# EAGLE board PCBprototyp-Rev3-m (EAGLE 9.6.2)
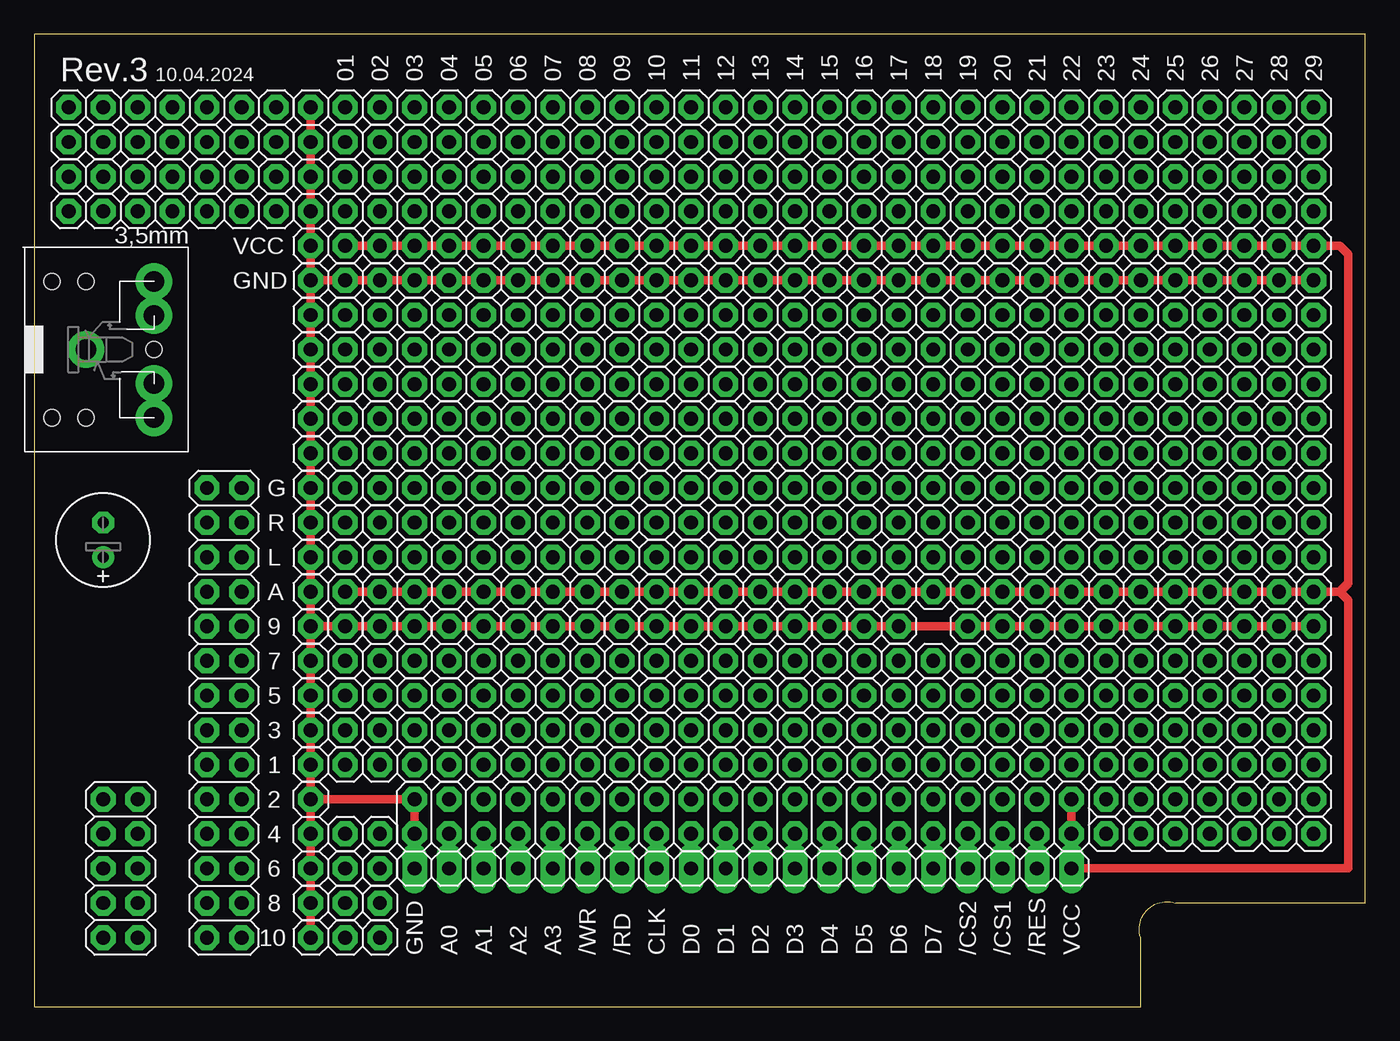
[diagram p0: board, top side]
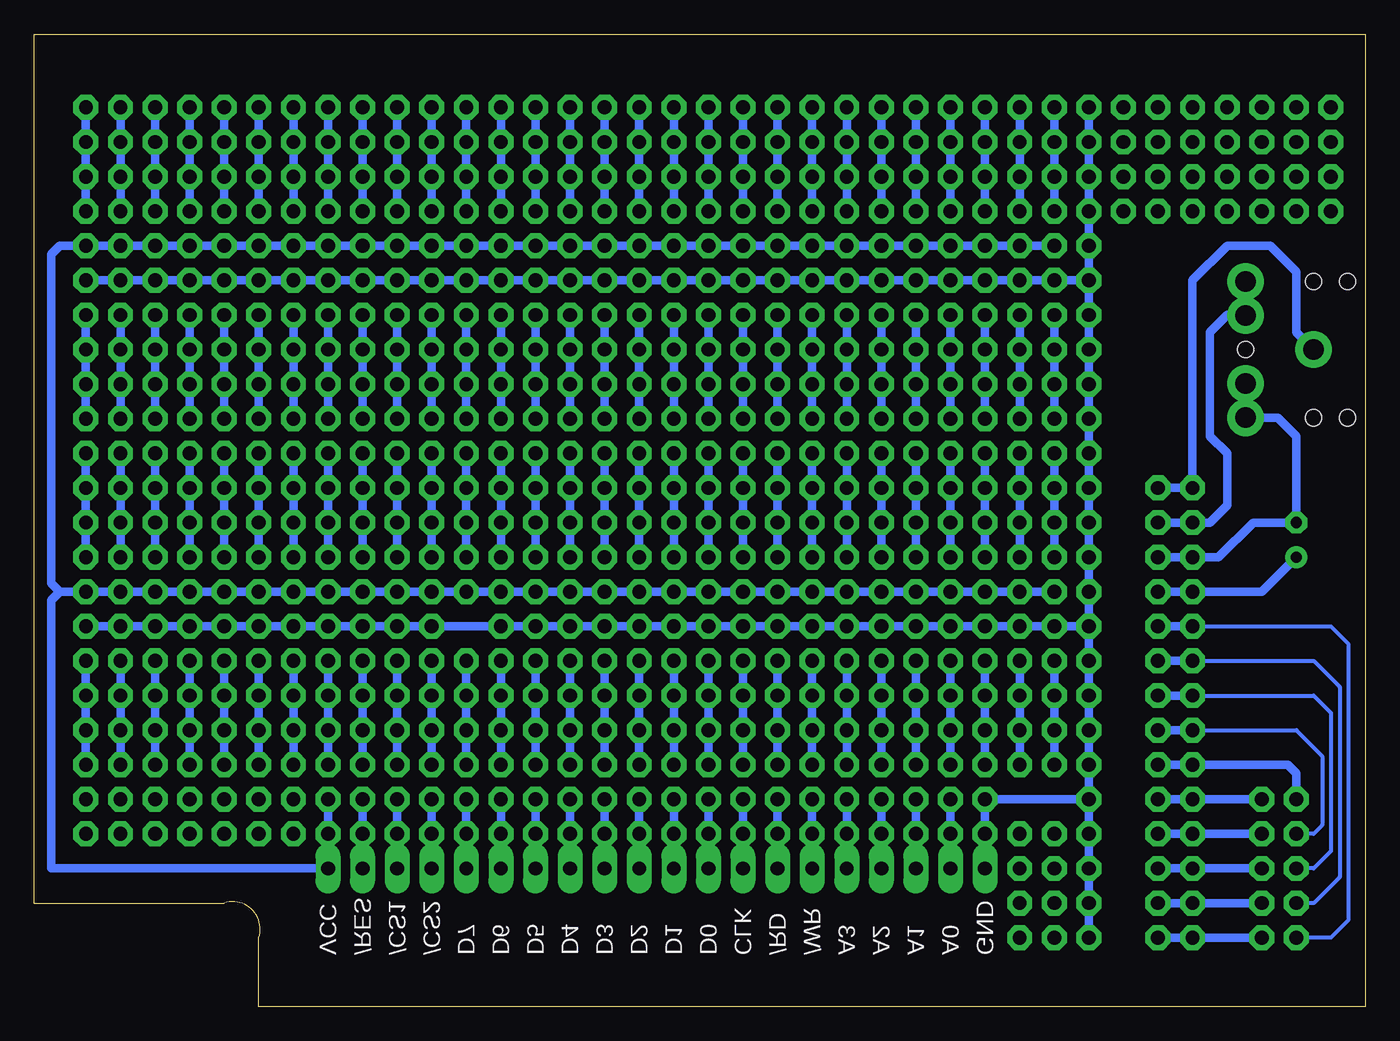
[diagram p1: board, bottom side, seen from below]

Size 97.79 x 71.42 mm. Coordinates in mm from the lower left corner, seen from the top.
Outline: 97.77,7.62 97.77,71.42 0,71.42 0,0 81.28,0 81.28,5.08 arc-127 83.82,7.62 97.79,7.62
Copper layers (1*16): Top 0.035mm / dielectric 1.6mm / Bottom 0.035mm
Design rules "jlcpcb-2layers": minimum track width 5mil, minimum drill 0.3mm, track to track 5mil, track to pad 5mil, pad to pad 5mil, via to via 5mil, smd to smd 5mil, copper to edge 0.2mm, drill to drill 6mil, minimum pad ring 10mil, minimum via ring 3mil, stop-mask expansion 4mil, vias tented up to drill 0mil, thermal gap 10mil
Net classes: 0 default: width 0.254 mm; 1 Power: width 0.457 mm

## Footprints (pad centres in the part's own frame; a part is rotated, then mirrored left to right if it is on the bottom)
E2,5-7 = drill 0.813 pad 1.6: + -1.27,0 | drill 0.813 pad 1.6 octagon: - 1.27,0
1X20 = drill 1.016 long: 1 -24.13,0; 2 -21.59,0; 3 -19.05,0; 4 -16.51,0; 5 -13.97,0; 6 -11.43,0; 7 -8.89,0; 8 -6.35,0; 9 -3.81,0; 10 -1.27,0; 11 1.27,0; 12 3.81,0; 13 6.35,0; 14 8.89,0; 15 11.43,0; 16 13.97,0; 17 16.51,0; 18 19.05,0; 19 21.59,0; 20 24.13,0
1X01 = drill 1.016 octagon: 1 0,0
2X20 = drill 1.016 octagon: 1 -24.13,-1.27; 2 -24.13,1.27; 3 -21.59,-1.27; 4 -21.59,1.27; 5 -19.05,-1.27; 6 -19.05,1.27; 7 -16.51,-1.27; 8 -16.51,1.27; 9 -13.97,-1.27; 10 -13.97,1.27; 11 -11.43,-1.27; 12 -11.43,1.27; 13 -8.89,-1.27; 14 -8.89,1.27; 15 -6.35,-1.27; 16 -6.35,1.27; 17 -3.81,-1.27; 18 -3.81,1.27; 19 -1.27,-1.27; 20 -1.27,1.27; 21 1.27,-1.27; 22 1.27,1.27; 23 3.81,-1.27; 24 3.81,1.27; 25 6.35,-1.27; 26 6.35,1.27; 27 8.89,-1.27; 28 8.89,1.27; 29 11.43,-1.27; 30 11.43,1.27; 31 13.97,-1.27; 32 13.97,1.27; 33 16.51,-1.27; 34 16.51,1.27; 35 19.05,-1.27; 36 19.05,1.27; 37 21.59,-1.27; 38 21.59,1.27; 39 24.13,-1.27; 40 24.13,1.27
2X10 = drill 1.016 octagon: 1 -11.43,-1.27; 2 -11.43,1.27; 3 -8.89,-1.27; 4 -8.89,1.27; 5 -6.35,-1.27; 6 -6.35,1.27; 7 -3.81,-1.27; 8 -3.81,1.27; 9 -1.27,-1.27; 10 -1.27,1.27; 11 1.27,-1.27; 12 1.27,1.27; 13 3.81,-1.27; 14 3.81,1.27; 15 6.35,-1.27; 16 6.35,1.27; 17 8.89,-1.27; 18 8.89,1.27; 19 11.43,-1.27; 20 11.43,1.27
2X05 = drill 1.016 octagon: 1 -5.08,-1.27; 2 -5.08,1.27; 3 -2.54,-1.27; 4 -2.54,1.27; 5 0,-1.27; 6 0,1.27; 7 2.54,-1.27; 8 2.54,1.27; 9 5.08,-1.27; 10 5.08,1.27
2X04 = drill 1.016 octagon: 1 -3.81,-1.27; 2 -3.81,1.27; 3 -1.27,-1.27; 4 -1.27,1.27; 5 1.27,-1.27; 6 1.27,1.27; 7 3.81,-1.27; 8 3.81,1.27
SJ1-352XN = drill 1.5 pad 2.184: 1 0,0; 2 5,-5; 3 5,5; 10 5,-2.5; 11 5,2.5 | hole 1.2: 5,0; 0,5; 0,-5; -2.5,-5; -2.5,5

## Placement (x,y rotation side)
C7  220µF  [E2,5-7]  5.08,34.29 90 top
JP1  [1X20]  52.07,10.16 180 top
JP2  [1X01]  93.98,27.94 0 top
JP3  [2X20]  52.07,13.97 180 top
JP4  [2X10]  13.97,16.51 90 top
JP5  [1X01]  22.86,25.4 0 top
JP6  [1X01]  22.86,22.86 0 top
JP7  [1X01]  22.86,20.32 0 top
JP8  [1X01]  22.86,17.78 0 top
JP9  [1X01]  33.02,27.94 90 top
JP10  [1X01]  22.86,27.94 90 top
JP11  [1X01]  27.94,27.94 90 top
JP12  [1X01]  25.4,27.94 90 top
JP13  [1X01]  30.48,27.94 90 top
JP14  [1X01]  35.56,27.94 90 top
JP15  [1X01]  38.1,27.94 90 top
JP16  [1X01]  40.64,27.94 90 top
JP17  [1X01]  43.18,27.94 90 top
JP18  [1X01]  45.72,27.94 90 top
JP19  [1X01]  48.26,27.94 90 top
JP20  [1X01]  50.8,27.94 90 top
JP21  [1X01]  53.34,27.94 90 top
JP22  [1X01]  55.88,27.94 90 top
JP23  [1X01]  58.42,27.94 90 top
JP24  [1X01]  60.96,27.94 90 top
JP26  [1X01]  63.5,27.94 0 top
JP27  [1X01]  71.12,27.94 0 top
JP28  [1X01]  68.58,27.94 0 top
JP29  [1X01]  73.66,27.94 0 top
JP30  [1X01]  76.2,27.94 0 top
JP31  [1X01]  78.74,27.94 0 top
JP32  [1X01]  81.28,27.94 0 top
JP33  [1X01]  83.82,27.94 0 top
JP34  [1X01]  43.18,30.48 0 top
JP35  [1X01]  53.34,30.48 0 top
JP36  [1X01]  63.5,30.48 0 top
JP37  [1X01]  66.04,30.48 0 top
JP38  [1X01]  83.82,30.48 0 top
JP39  [1X01]  40.64,30.48 0 top
JP40  [1X01]  50.8,30.48 0 top
JP41  [1X01]  60.96,30.48 0 top
JP42  [1X01]  68.58,30.48 0 top
JP43  [1X01]  81.28,30.48 0 top
JP44  [1X01]  38.1,30.48 0 top
JP45  [1X01]  48.26,30.48 0 top
JP46  [1X01]  58.42,30.48 0 top
JP47  [1X01]  71.12,30.48 0 top
JP48  [1X01]  78.74,30.48 0 top
JP49  [1X01]  35.56,30.48 0 top
JP50  [1X01]  45.72,30.48 0 top
JP51  [1X01]  55.88,30.48 0 top
JP52  [1X01]  73.66,30.48 0 top
JP53  [1X01]  76.2,30.48 0 top
JP54  [1X01]  22.86,30.48 0 top
JP55  [1X01]  25.4,30.48 0 top
JP56  [1X01]  27.94,30.48 0 top
JP57  [1X01]  30.48,30.48 0 top
JP58  [1X01]  33.02,30.48 0 top
JP59  [1X01]  22.86,33.02 0 top
JP60  [1X01]  22.86,35.56 0 top
JP61  [1X01]  22.86,38.1 0 top
JP62  [1X01]  22.86,40.64 0 top
JP63  [1X01]  22.86,63.5 0 top
JP64  [1X01]  22.86,60.96 0 top
JP65  [1X01]  22.86,58.42 0 top
JP66  [1X01]  22.86,66.04 0 top
JP67  [1X01]  22.86,45.72 0 top
JP68  [1X01]  22.86,43.18 0 top
JP69  [1X01]  20.32,15.24 90 top
JP70  [1X01]  20.32,12.7 90 top
JP71  [1X01]  20.32,58.42 90 top
JP72  [1X01]  20.32,7.62 0 top
JP73  [1X01]  20.32,5.08 0 top
JP74  [1X01]  20.32,66.04 90 top
JP75  [1X01]  20.32,63.5 90 top
JP76  [1X01]  20.32,60.96 90 top
JP77  [1X01]  20.32,10.16 0 top
JP78  [1X01]  20.32,55.88 0 top
JP79  [1X01]  20.32,43.18 0 top
JP80  [1X01]  20.32,45.72 0 top
JP81  [1X01]  20.32,48.26 0 top
JP82  [1X01]  20.32,50.8 0 top
JP83  [1X01]  20.32,53.34 0 top
JP84  [1X01]  20.32,30.48 0 top
JP85  [1X01]  20.32,33.02 0 top
JP86  [1X01]  20.32,35.56 0 top
JP87  [1X01]  20.32,38.1 0 top
JP88  [1X01]  20.32,40.64 0 top
JP89  [1X01]  20.32,27.94 0 top
JP90  [1X01]  20.32,25.4 0 top
JP91  [1X01]  20.32,22.86 0 top
JP92  [1X01]  20.32,20.32 0 top
JP93  [1X01]  20.32,17.78 0 top
JP94  [2X05]  6.35,10.16 270 top
JP95  [2X04]  13.97,34.29 90 top
JP96  [1X01]  88.9,27.94 0 top
JP97  [1X01]  86.36,27.94 0 top
JP98  [1X01]  91.44,27.94 0 top
JP99  [1X01]  88.9,30.48 0 top
JP100  [1X01]  93.98,30.48 0 top
JP101  [1X01]  86.36,30.48 0 top
JP102  [1X01]  91.44,30.48 0 top
JP103  [1X01]  25.4,33.02 0 top
JP104  [1X01]  25.4,35.56 0 top
JP105  [1X01]  25.4,38.1 0 top
JP106  [1X01]  25.4,40.64 0 top
JP107  [1X01]  25.4,43.18 0 top
JP108  [1X01]  25.4,45.72 0 top
JP109  [1X01]  25.4,48.26 0 top
JP110  [1X01]  25.4,50.8 0 top
JP111  [1X01]  53.34,55.88 0 top
JP112  [1X01]  60.96,55.88 0 top
JP113  [1X01]  55.88,55.88 0 top
JP114  [1X01]  50.8,55.88 0 top
JP115  [1X01]  45.72,55.88 0 top
JP116  [1X01]  43.18,55.88 0 top
JP117  [1X01]  40.64,55.88 0 top
JP118  [1X01]  38.1,55.88 0 top
JP119  [1X01]  35.56,55.88 0 top
JP120  [1X01]  91.44,55.88 0 top
JP121  [1X01]  93.98,55.88 0 top
JP122  [1X01]  22.86,55.88 0 top
JP123  [1X01]  25.4,55.88 0 top
JP124  [1X01]  88.9,55.88 0 top
JP125  [1X01]  86.36,55.88 0 top
JP126  [1X01]  83.82,55.88 0 top
JP127  [1X01]  27.94,55.88 0 top
JP128  [1X01]  76.2,55.88 0 top
JP129  [1X01]  78.74,55.88 0 top
JP130  [1X01]  81.28,55.88 0 top
JP131  [1X01]  30.48,55.88 0 top
JP132  [1X01]  73.66,55.88 0 top
JP133  [1X01]  71.12,55.88 0 top
JP134  [1X01]  68.58,55.88 0 top
JP135  [1X01]  33.02,55.88 0 top
JP136  [1X01]  63.5,55.88 0 top
JP137  [1X01]  66.04,55.88 0 top
JP138  [1X01]  58.42,55.88 0 top
JP139  [1X01]  48.26,55.88 0 top
JP140  [1X01]  83.82,53.34 0 top
JP141  [1X01]  81.28,53.34 0 top
JP142  [1X01]  91.44,53.34 0 top
JP143  [1X01]  93.98,53.34 0 top
JP144  [1X01]  76.2,53.34 0 top
JP145  [1X01]  78.74,53.34 0 top
JP146  [1X01]  88.9,53.34 0 top
JP147  [1X01]  86.36,53.34 0 top
JP148  [1X01]  68.58,53.34 0 top
JP149  [1X01]  71.12,53.34 0 top
JP150  [1X01]  73.66,53.34 0 top
JP151  [1X01]  43.18,53.34 0 top
JP152  [1X01]  66.04,53.34 0 top
JP153  [1X01]  63.5,53.34 0 top
JP154  [1X01]  60.96,53.34 0 top
JP155  [1X01]  40.64,53.34 0 top
JP156  [1X01]  53.34,53.34 0 top
JP157  [1X01]  55.88,53.34 0 top
JP158  [1X01]  58.42,53.34 0 top
JP159  [1X01]  38.1,53.34 0 top
JP160  [1X01]  50.8,53.34 0 top
JP161  [1X01]  48.26,53.34 0 top
JP162  [1X01]  45.72,53.34 0 top
JP163  [1X01]  35.56,53.34 0 top
JP164  [1X01]  25.4,53.34 0 top
JP165  [1X01]  27.94,53.34 0 top
JP166  [1X01]  30.48,53.34 0 top
JP167  [1X01]  33.02,53.34 0 top
JP168  [1X01]  22.86,53.34 0 top
JP169  [1X01]  22.86,50.8 0 top
JP170  [1X01]  22.86,48.26 0 top
JP171  [1X01]  78.74,12.7 0 top
JP172  [1X01]  22.86,12.7 0 top
JP173  [1X01]  17.78,66.04 0 top
JP174  [1X01]  17.78,63.5 0 top
JP175  [1X01]  78.74,15.24 0 top
JP176  [1X01]  17.78,60.96 0 top
JP177  [1X01]  17.78,58.42 0 top
JP178  [1X01]  27.94,33.02 0 top
JP179  [1X01]  27.94,35.56 0 top
JP180  [1X01]  27.94,38.1 0 top
JP181  [1X01]  27.94,40.64 0 top
JP182  [1X01]  30.48,33.02 0 top
JP183  [1X01]  30.48,35.56 0 top
JP184  [1X01]  30.48,38.1 0 top
JP185  [1X01]  30.48,40.64 0 top
JP186  [1X01]  30.48,43.18 0 top
JP187  [1X01]  30.48,45.72 0 top
JP188  [1X01]  30.48,48.26 0 top
JP189  [1X01]  30.48,50.8 0 top
JP190  [1X01]  27.94,45.72 0 top
JP191  [1X01]  27.94,43.18 0 top
JP192  [1X01]  27.94,50.8 0 top
JP193  [1X01]  27.94,48.26 0 top
JP194  [1X01]  33.02,33.02 0 top
JP195  [1X01]  33.02,35.56 0 top
JP196  [1X01]  33.02,38.1 0 top
JP197  [1X01]  33.02,40.64 0 top
JP198  [1X01]  35.56,33.02 0 top
JP199  [1X01]  35.56,35.56 0 top
JP200  [1X01]  35.56,38.1 0 top
JP201  [1X01]  35.56,40.64 0 top
JP202  [1X01]  35.56,43.18 0 top
JP203  [1X01]  35.56,45.72 0 top
JP204  [1X01]  35.56,48.26 0 top
JP205  [1X01]  35.56,50.8 0 top
JP206  [1X01]  33.02,45.72 0 top
JP207  [1X01]  33.02,43.18 0 top
JP208  [1X01]  33.02,50.8 0 top
JP209  [1X01]  33.02,48.26 0 top
JP210  [1X01]  38.1,33.02 0 top
JP211  [1X01]  38.1,35.56 0 top
JP212  [1X01]  38.1,38.1 0 top
JP213  [1X01]  38.1,40.64 0 top
JP214  [1X01]  40.64,33.02 0 top
JP215  [1X01]  40.64,35.56 0 top
JP216  [1X01]  40.64,38.1 0 top
JP217  [1X01]  40.64,40.64 0 top
JP218  [1X01]  40.64,43.18 0 top
JP219  [1X01]  40.64,45.72 0 top
JP220  [1X01]  40.64,48.26 0 top
JP221  [1X01]  40.64,50.8 0 top
JP222  [1X01]  38.1,45.72 0 top
JP223  [1X01]  38.1,43.18 0 top
JP224  [1X01]  38.1,50.8 0 top
JP225  [1X01]  38.1,48.26 0 top
JP226  [1X01]  43.18,33.02 0 top
JP227  [1X01]  43.18,35.56 0 top
JP228  [1X01]  43.18,38.1 0 top
JP229  [1X01]  43.18,40.64 0 top
JP230  [1X01]  45.72,33.02 0 top
JP231  [1X01]  45.72,35.56 0 top
JP232  [1X01]  45.72,38.1 0 top
JP233  [1X01]  45.72,40.64 0 top
JP234  [1X01]  45.72,43.18 0 top
JP235  [1X01]  45.72,45.72 0 top
JP236  [1X01]  45.72,48.26 0 top
JP237  [1X01]  45.72,50.8 0 top
JP238  [1X01]  43.18,45.72 0 top
JP239  [1X01]  43.18,43.18 0 top
JP240  [1X01]  43.18,50.8 0 top
JP241  [1X01]  43.18,48.26 0 top
JP242  [1X01]  48.26,33.02 0 top
JP243  [1X01]  48.26,35.56 0 top
JP244  [1X01]  48.26,38.1 0 top
JP245  [1X01]  48.26,40.64 0 top
JP246  [1X01]  50.8,33.02 0 top
JP247  [1X01]  50.8,35.56 0 top
JP248  [1X01]  50.8,38.1 0 top
JP249  [1X01]  50.8,40.64 0 top
JP250  [1X01]  50.8,43.18 0 top
JP251  [1X01]  50.8,45.72 0 top
JP252  [1X01]  50.8,48.26 0 top
JP253  [1X01]  50.8,50.8 0 top
JP254  [1X01]  48.26,45.72 0 top
JP255  [1X01]  48.26,43.18 0 top
JP256  [1X01]  48.26,50.8 0 top
JP257  [1X01]  48.26,48.26 0 top
JP258  [1X01]  53.34,33.02 0 top
JP259  [1X01]  53.34,35.56 0 top
JP260  [1X01]  53.34,38.1 0 top
JP261  [1X01]  53.34,40.64 0 top
JP262  [1X01]  55.88,33.02 0 top
JP263  [1X01]  55.88,35.56 0 top
JP264  [1X01]  55.88,38.1 0 top
JP265  [1X01]  55.88,40.64 0 top
JP266  [1X01]  55.88,43.18 0 top
JP267  [1X01]  55.88,45.72 0 top
JP268  [1X01]  55.88,48.26 0 top
JP269  [1X01]  55.88,50.8 0 top
JP270  [1X01]  53.34,45.72 0 top
JP271  [1X01]  53.34,43.18 0 top
JP272  [1X01]  53.34,50.8 0 top
JP273  [1X01]  53.34,48.26 0 top
JP274  [1X01]  58.42,33.02 0 top
JP275  [1X01]  58.42,35.56 0 top
JP276  [1X01]  58.42,38.1 0 top
JP277  [1X01]  58.42,40.64 0 top
JP278  [1X01]  60.96,33.02 0 top
JP279  [1X01]  60.96,35.56 0 top
JP280  [1X01]  60.96,38.1 0 top
JP281  [1X01]  60.96,40.64 0 top
JP282  [1X01]  60.96,43.18 0 top
JP283  [1X01]  60.96,45.72 0 top
JP284  [1X01]  60.96,48.26 0 top
JP285  [1X01]  60.96,50.8 0 top
JP286  [1X01]  58.42,45.72 0 top
JP287  [1X01]  58.42,43.18 0 top
JP288  [1X01]  58.42,50.8 0 top
JP289  [1X01]  58.42,48.26 0 top
JP290  [1X01]  63.5,33.02 0 top
JP291  [1X01]  63.5,35.56 0 top
JP292  [1X01]  63.5,38.1 0 top
JP293  [1X01]  63.5,40.64 0 top
JP294  [1X01]  66.04,33.02 0 top
JP295  [1X01]  66.04,35.56 0 top
JP296  [1X01]  66.04,38.1 0 top
JP297  [1X01]  66.04,40.64 0 top
JP298  [1X01]  66.04,43.18 0 top
JP299  [1X01]  66.04,45.72 0 top
JP300  [1X01]  66.04,48.26 0 top
JP301  [1X01]  66.04,50.8 0 top
JP302  [1X01]  63.5,45.72 0 top
JP303  [1X01]  63.5,43.18 0 top
JP304  [1X01]  63.5,50.8 0 top
JP305  [1X01]  63.5,48.26 0 top
JP306  [1X01]  68.58,33.02 0 top
JP307  [1X01]  68.58,35.56 0 top
JP308  [1X01]  68.58,38.1 0 top
JP309  [1X01]  68.58,40.64 0 top
JP310  [1X01]  71.12,33.02 0 top
JP311  [1X01]  71.12,35.56 0 top
JP312  [1X01]  71.12,38.1 0 top
JP313  [1X01]  71.12,40.64 0 top
JP314  [1X01]  71.12,43.18 0 top
JP315  [1X01]  71.12,45.72 0 top
JP316  [1X01]  71.12,48.26 0 top
JP317  [1X01]  71.12,50.8 0 top
JP318  [1X01]  68.58,45.72 0 top
JP319  [1X01]  68.58,43.18 0 top
JP320  [1X01]  68.58,50.8 0 top
JP321  [1X01]  68.58,48.26 0 top
JP322  [1X01]  73.66,33.02 0 top
JP323  [1X01]  73.66,35.56 0 top
JP324  [1X01]  73.66,38.1 0 top
JP325  [1X01]  73.66,40.64 0 top
JP326  [1X01]  76.2,33.02 0 top
JP327  [1X01]  76.2,35.56 0 top
JP328  [1X01]  76.2,38.1 0 top
JP329  [1X01]  76.2,40.64 0 top
JP330  [1X01]  76.2,43.18 0 top
JP331  [1X01]  76.2,45.72 0 top
JP332  [1X01]  76.2,48.26 0 top
JP333  [1X01]  76.2,50.8 0 top
JP334  [1X01]  73.66,45.72 0 top
JP335  [1X01]  73.66,43.18 0 top
JP336  [1X01]  73.66,50.8 0 top
JP337  [1X01]  73.66,48.26 0 top
JP338  [1X01]  78.74,33.02 0 top
JP339  [1X01]  78.74,35.56 0 top
JP340  [1X01]  78.74,38.1 0 top
JP341  [1X01]  78.74,40.64 0 top
JP342  [1X01]  81.28,33.02 0 top
JP343  [1X01]  81.28,35.56 0 top
JP344  [1X01]  81.28,38.1 0 top
JP345  [1X01]  81.28,40.64 0 top
JP346  [1X01]  81.28,43.18 0 top
JP347  [1X01]  81.28,45.72 0 top
JP348  [1X01]  81.28,48.26 0 top
JP349  [1X01]  81.28,50.8 0 top
JP350  [1X01]  78.74,45.72 0 top
JP351  [1X01]  78.74,43.18 0 top
JP352  [1X01]  78.74,50.8 0 top
JP353  [1X01]  78.74,48.26 0 top
JP354  [1X01]  83.82,33.02 0 top
JP355  [1X01]  83.82,35.56 0 top
JP356  [1X01]  83.82,38.1 0 top
JP357  [1X01]  83.82,40.64 0 top
JP358  [1X01]  83.82,43.18 0 top
JP359  [1X01]  83.82,45.72 0 top
JP360  [1X01]  83.82,48.26 0 top
JP361  [1X01]  83.82,50.8 0 top
JP362  [1X01]  86.36,33.02 0 top
JP363  [1X01]  86.36,35.56 0 top
JP364  [1X01]  86.36,38.1 0 top
JP365  [1X01]  86.36,40.64 0 top
JP366  [1X01]  88.9,33.02 0 top
JP367  [1X01]  88.9,35.56 0 top
JP368  [1X01]  88.9,38.1 0 top
JP369  [1X01]  88.9,40.64 0 top
JP370  [1X01]  88.9,43.18 0 top
JP371  [1X01]  88.9,45.72 0 top
JP372  [1X01]  88.9,48.26 0 top
JP373  [1X01]  88.9,50.8 0 top
JP374  [1X01]  86.36,45.72 0 top
JP375  [1X01]  86.36,43.18 0 top
JP376  [1X01]  86.36,50.8 0 top
JP377  [1X01]  86.36,48.26 0 top
JP378  [1X01]  91.44,33.02 0 top
JP379  [1X01]  91.44,35.56 0 top
JP380  [1X01]  91.44,38.1 0 top
JP381  [1X01]  91.44,40.64 0 top
JP382  [1X01]  93.98,33.02 0 top
JP383  [1X01]  93.98,35.56 0 top
JP384  [1X01]  93.98,38.1 0 top
JP385  [1X01]  93.98,40.64 0 top
JP386  [1X01]  93.98,43.18 0 top
JP387  [1X01]  93.98,45.72 0 top
JP388  [1X01]  93.98,48.26 0 top
JP389  [1X01]  93.98,50.8 0 top
JP390  [1X01]  91.44,45.72 0 top
JP391  [1X01]  91.44,43.18 0 top
JP392  [1X01]  91.44,50.8 0 top
JP393  [1X01]  91.44,48.26 0 top
JP394  [1X01]  25.4,25.4 0 top
JP395  [1X01]  25.4,22.86 0 top
JP396  [1X01]  25.4,20.32 0 top
JP397  [1X01]  25.4,17.78 0 top
JP398  [1X01]  27.94,25.4 0 top
JP399  [1X01]  27.94,22.86 0 top
JP400  [1X01]  27.94,20.32 0 top
JP401  [1X01]  27.94,17.78 0 top
JP402  [1X01]  30.48,25.4 0 top
JP403  [1X01]  30.48,22.86 0 top
JP404  [1X01]  30.48,20.32 0 top
JP405  [1X01]  30.48,17.78 0 top
JP406  [1X01]  33.02,25.4 0 top
JP407  [1X01]  33.02,22.86 0 top
JP408  [1X01]  33.02,20.32 0 top
JP409  [1X01]  33.02,17.78 0 top
JP410  [1X01]  35.56,25.4 0 top
JP411  [1X01]  35.56,22.86 0 top
JP412  [1X01]  35.56,20.32 0 top
JP413  [1X01]  35.56,17.78 0 top
JP414  [1X01]  38.1,25.4 0 top
JP415  [1X01]  38.1,22.86 0 top
JP416  [1X01]  38.1,20.32 0 top
JP417  [1X01]  38.1,17.78 0 top
JP418  [1X01]  40.64,25.4 0 top
JP419  [1X01]  40.64,22.86 0 top
JP420  [1X01]  40.64,20.32 0 top
JP421  [1X01]  40.64,17.78 0 top
JP422  [1X01]  43.18,25.4 0 top
JP423  [1X01]  43.18,22.86 0 top
JP424  [1X01]  43.18,20.32 0 top
JP425  [1X01]  43.18,17.78 0 top
JP426  [1X01]  45.72,25.4 0 top
JP427  [1X01]  45.72,22.86 0 top
JP428  [1X01]  45.72,20.32 0 top
JP429  [1X01]  45.72,17.78 0 top
JP430  [1X01]  48.26,25.4 0 top
JP431  [1X01]  48.26,22.86 0 top
JP432  [1X01]  48.26,20.32 0 top
JP433  [1X01]  48.26,17.78 0 top
JP434  [1X01]  50.8,25.4 0 top
JP435  [1X01]  50.8,22.86 0 top
JP436  [1X01]  50.8,20.32 0 top
JP437  [1X01]  50.8,17.78 0 top
JP438  [1X01]  53.34,25.4 0 top
JP439  [1X01]  53.34,22.86 0 top
JP440  [1X01]  53.34,20.32 0 top
JP441  [1X01]  53.34,17.78 0 top
JP442  [1X01]  55.88,25.4 0 top
JP443  [1X01]  55.88,22.86 0 top
JP444  [1X01]  55.88,20.32 0 top
JP445  [1X01]  55.88,17.78 0 top
JP446  [1X01]  58.42,25.4 0 top
JP447  [1X01]  58.42,22.86 0 top
JP448  [1X01]  58.42,20.32 0 top
JP449  [1X01]  58.42,17.78 0 top
JP450  [1X01]  60.96,25.4 0 top
JP451  [1X01]  60.96,22.86 0 top
JP452  [1X01]  60.96,20.32 0 top
JP453  [1X01]  60.96,17.78 0 top
JP454  [1X01]  63.5,25.4 0 top
JP455  [1X01]  63.5,22.86 0 top
JP456  [1X01]  63.5,20.32 0 top
JP457  [1X01]  63.5,17.78 0 top
JP458  [1X01]  66.04,25.4 0 top
JP459  [1X01]  66.04,22.86 0 top
JP460  [1X01]  66.04,20.32 0 top
JP461  [1X01]  66.04,17.78 0 top
JP462  [1X01]  68.58,25.4 0 top
JP463  [1X01]  68.58,22.86 0 top
JP464  [1X01]  68.58,20.32 0 top
JP465  [1X01]  68.58,17.78 0 top
JP466  [1X01]  71.12,25.4 0 top
JP467  [1X01]  71.12,22.86 0 top
JP468  [1X01]  71.12,20.32 0 top
JP469  [1X01]  71.12,17.78 0 top
JP470  [1X01]  73.66,25.4 0 top
JP471  [1X01]  73.66,22.86 0 top
JP472  [1X01]  73.66,20.32 0 top
JP473  [1X01]  73.66,17.78 0 top
JP474  [1X01]  76.2,25.4 0 top
JP475  [1X01]  76.2,22.86 0 top
JP476  [1X01]  76.2,20.32 0 top
JP477  [1X01]  76.2,17.78 0 top
JP478  [1X01]  78.74,25.4 0 top
JP479  [1X01]  78.74,22.86 0 top
JP480  [1X01]  78.74,20.32 0 top
JP481  [1X01]  78.74,17.78 0 top
JP482  [1X01]  81.28,25.4 0 top
JP483  [1X01]  81.28,22.86 0 top
JP484  [1X01]  81.28,20.32 0 top
JP485  [1X01]  81.28,17.78 0 top
JP486  [1X01]  83.82,25.4 0 top
JP487  [1X01]  83.82,22.86 0 top
JP488  [1X01]  83.82,20.32 0 top
JP489  [1X01]  83.82,17.78 0 top
JP490  [1X01]  86.36,25.4 0 top
JP491  [1X01]  86.36,22.86 0 top
JP492  [1X01]  86.36,20.32 0 top
JP493  [1X01]  86.36,17.78 0 top
JP494  [1X01]  88.9,25.4 0 top
JP495  [1X01]  88.9,22.86 0 top
JP496  [1X01]  88.9,20.32 0 top
JP497  [1X01]  88.9,17.78 0 top
JP498  [1X01]  91.44,25.4 0 top
JP499  [1X01]  91.44,22.86 0 top
JP500  [1X01]  91.44,20.32 0 top
JP501  [1X01]  91.44,17.78 0 top
JP502  [1X01]  93.98,25.4 0 top
JP503  [1X01]  93.98,22.86 0 top
JP504  [1X01]  93.98,20.32 0 top
JP505  [1X01]  93.98,17.78 0 top
JP506  [1X01]  25.4,12.7 0 top
JP507  [1X01]  22.86,10.16 0 top
JP508  [1X01]  25.4,10.16 0 top
JP509  [1X01]  22.86,7.62 0 top
JP510  [1X01]  25.4,7.62 0 top
JP511  [1X01]  22.86,5.08 0 top
JP512  [1X01]  25.4,5.08 0 top
JP513  [1X01]  81.28,15.24 0 top
JP514  [1X01]  83.82,15.24 0 top
JP515  [1X01]  81.28,12.7 0 top
JP516  [1X01]  83.82,12.7 0 top
JP517  [1X01]  86.36,12.7 0 top
JP518  [1X01]  86.36,15.24 0 top
JP519  [1X01]  88.9,15.24 0 top
JP520  [1X01]  91.44,15.24 0 top
JP521  [1X01]  88.9,12.7 0 top
JP522  [1X01]  91.44,12.7 0 top
JP523  [1X01]  93.98,15.24 0 top
JP524  [1X01]  93.98,12.7 0 top
JP525  [1X01]  15.24,66.04 0 top
JP526  [1X01]  15.24,63.5 0 top
JP527  [1X01]  15.24,60.96 0 top
JP528  [1X01]  15.24,58.42 0 top
JP529  [1X01]  12.7,66.04 0 top
JP530  [1X01]  12.7,63.5 0 top
JP531  [1X01]  12.7,60.96 0 top
JP532  [1X01]  12.7,58.42 0 top
JP533  [1X01]  10.16,66.04 0 top
JP534  [1X01]  10.16,63.5 0 top
JP535  [1X01]  10.16,60.96 0 top
JP536  [1X01]  10.16,58.42 0 top
JP537  [1X01]  7.62,66.04 0 top
JP538  [1X01]  7.62,63.5 0 top
JP539  [1X01]  7.62,60.96 0 top
JP540  [1X01]  7.62,58.42 0 top
JP541  [1X01]  5.08,66.04 0 top
JP542  [1X01]  5.08,63.5 0 top
JP543  [1X01]  5.08,60.96 0 top
JP544  [1X01]  5.08,58.42 0 top
JP545  [1X01]  2.54,66.04 0 top
JP546  [1X01]  2.54,63.5 0 top
JP547  [1X01]  2.54,60.96 0 top
JP548  [1X01]  2.54,58.42 0 top
JP549  [1X01]  25.4,66.04 0 top
JP550  [1X01]  25.4,63.5 0 top
JP551  [1X01]  25.4,60.96 0 top
JP552  [1X01]  25.4,58.42 0 top
JP553  [1X01]  27.94,66.04 0 top
JP554  [1X01]  27.94,63.5 0 top
JP555  [1X01]  27.94,60.96 0 top
JP556  [1X01]  27.94,58.42 0 top
JP557  [1X01]  30.48,66.04 0 top
JP558  [1X01]  30.48,63.5 0 top
JP559  [1X01]  30.48,60.96 0 top
JP560  [1X01]  30.48,58.42 0 top
JP561  [1X01]  33.02,66.04 0 top
JP562  [1X01]  33.02,63.5 0 top
JP563  [1X01]  33.02,60.96 0 top
JP564  [1X01]  33.02,58.42 0 top
JP565  [1X01]  35.56,66.04 0 top
JP566  [1X01]  35.56,63.5 0 top
JP567  [1X01]  35.56,60.96 0 top
JP568  [1X01]  35.56,58.42 0 top
JP569  [1X01]  38.1,66.04 0 top
JP570  [1X01]  38.1,63.5 0 top
JP571  [1X01]  38.1,60.96 0 top
JP572  [1X01]  38.1,58.42 0 top
JP573  [1X01]  40.64,66.04 0 top
JP574  [1X01]  40.64,63.5 0 top
JP575  [1X01]  40.64,60.96 0 top
JP576  [1X01]  40.64,58.42 0 top
JP577  [1X01]  43.18,66.04 0 top
JP578  [1X01]  43.18,63.5 0 top
JP579  [1X01]  43.18,60.96 0 top
JP580  [1X01]  43.18,58.42 0 top
JP581  [1X01]  45.72,66.04 0 top
JP582  [1X01]  45.72,63.5 0 top
JP583  [1X01]  45.72,60.96 0 top
JP584  [1X01]  45.72,58.42 0 top
JP585  [1X01]  48.26,66.04 0 top
JP586  [1X01]  48.26,63.5 0 top
JP587  [1X01]  48.26,60.96 0 top
JP588  [1X01]  48.26,58.42 0 top
JP589  [1X01]  50.8,66.04 0 top
JP590  [1X01]  50.8,63.5 0 top
JP591  [1X01]  50.8,60.96 0 top
JP592  [1X01]  50.8,58.42 0 top
JP593  [1X01]  53.34,66.04 0 top
JP594  [1X01]  53.34,63.5 0 top
JP595  [1X01]  53.34,60.96 0 top
JP596  [1X01]  53.34,58.42 0 top
JP597  [1X01]  55.88,66.04 0 top
JP598  [1X01]  55.88,63.5 0 top
JP599  [1X01]  55.88,60.96 0 top
JP600  [1X01]  55.88,58.42 0 top
JP601  [1X01]  58.42,66.04 0 top
JP602  [1X01]  58.42,63.5 0 top
JP603  [1X01]  58.42,60.96 0 top
JP604  [1X01]  58.42,58.42 0 top
JP605  [1X01]  60.96,66.04 0 top
JP606  [1X01]  60.96,63.5 0 top
JP607  [1X01]  60.96,60.96 0 top
JP608  [1X01]  60.96,58.42 0 top
JP609  [1X01]  63.5,66.04 0 top
JP610  [1X01]  63.5,63.5 0 top
JP611  [1X01]  63.5,60.96 0 top
JP612  [1X01]  63.5,58.42 0 top
JP613  [1X01]  66.04,66.04 0 top
JP614  [1X01]  66.04,63.5 0 top
JP615  [1X01]  66.04,60.96 0 top
JP616  [1X01]  66.04,58.42 0 top
JP617  [1X01]  68.58,66.04 0 top
JP618  [1X01]  68.58,63.5 0 top
JP619  [1X01]  68.58,60.96 0 top
JP620  [1X01]  68.58,58.42 0 top
JP621  [1X01]  71.12,66.04 0 top
JP622  [1X01]  71.12,63.5 0 top
JP623  [1X01]  71.12,60.96 0 top
JP624  [1X01]  71.12,58.42 0 top
JP625  [1X01]  73.66,66.04 0 top
JP626  [1X01]  73.66,63.5 0 top
JP627  [1X01]  73.66,60.96 0 top
JP628  [1X01]  73.66,58.42 0 top
JP629  [1X01]  76.2,66.04 0 top
JP630  [1X01]  76.2,63.5 0 top
JP631  [1X01]  76.2,60.96 0 top
JP632  [1X01]  76.2,58.42 0 top
JP633  [1X01]  78.74,66.04 0 top
JP634  [1X01]  78.74,63.5 0 top
JP635  [1X01]  78.74,60.96 0 top
JP636  [1X01]  78.74,58.42 0 top
JP637  [1X01]  81.28,66.04 0 top
JP638  [1X01]  81.28,63.5 0 top
JP639  [1X01]  81.28,60.96 0 top
JP640  [1X01]  81.28,58.42 0 top
JP641  [1X01]  83.82,66.04 0 top
JP642  [1X01]  83.82,63.5 0 top
JP643  [1X01]  83.82,60.96 0 top
JP644  [1X01]  83.82,58.42 0 top
JP645  [1X01]  86.36,66.04 0 top
JP646  [1X01]  86.36,63.5 0 top
JP647  [1X01]  86.36,60.96 0 top
JP648  [1X01]  86.36,58.42 0 top
JP649  [1X01]  88.9,66.04 0 top
JP650  [1X01]  88.9,63.5 0 top
JP651  [1X01]  88.9,60.96 0 top
JP652  [1X01]  88.9,58.42 0 top
JP653  [1X01]  91.44,66.04 0 top
JP654  [1X01]  91.44,63.5 0 top
JP655  [1X01]  91.44,60.96 0 top
JP656  [1X01]  91.44,58.42 0 top
JP657  [1X01]  93.98,66.04 0 top
JP658  [1X01]  93.98,63.5 0 top
JP659  [1X01]  93.98,60.96 0 top
JP660  [1X01]  93.98,58.42 0 top
X1  AUX1  [SJ1-352XN]  3.81,48.26 0 top

## Library data of the parts
C7 = rcl; SPICEPREFIX: C
JP1-JP24 JP26-JP660 = pinhead
X1 = con-sj1-352xn

## Nets
/CS2: JP1.4 JP3.7 JP3.8
/RD: JP1.14 JP3.27 JP3.28
/RES: JP1.2 JP3.3 JP3.4
/WR: JP1.15 JP3.29 JP3.30
A0: JP1.19 JP3.37 JP3.38
A1: JP1.18 JP3.35 JP3.36
A2: JP1.17 JP3.33 JP3.34
A3: JP1.16 JP3.31 JP3.32
CLK: JP1.13 JP3.25 JP3.26
CS1: JP1.3 JP3.5 JP3.6
D0: JP1.12 JP3.23 JP3.24
D1: JP1.11 JP3.21 JP3.22
D2: JP1.10 JP3.19 JP3.20
D3: JP1.9 JP3.17 JP3.18
D4: JP1.8 JP3.15 JP3.16
D5: JP1.7 JP3.13 JP3.14
D6: JP1.6 JP3.11 JP3.12
D7: JP1.5 JP3.9 JP3.10
GND: JP1.20 JP2.1 JP3.39 JP3.40 JP9.1 JP10.1 JP11.1 JP12.1 JP13.1 JP14.1 JP15.1 JP16.1 JP17.1 JP18.1 JP19.1 JP20.1 JP21.1 JP22.1 JP23.1 JP24.1 JP26.1 JP27.1 JP28.1 JP29.1 JP30.1 JP31.1 JP32.1 JP33.1 JP69.1 JP70.1 JP71.1 JP72.1 JP73.1 JP74.1 JP75.1 JP76.1 JP77.1 JP78.1 JP79.1 JP80.1 JP81.1 JP82.1 JP83.1 JP84.1 JP85.1 JP86.1 JP87.1 JP88.1 JP89.1 JP90.1 JP91.1 JP92.1 JP93.1 JP96.1 JP97.1 JP98.1 JP140.1 JP141.1 JP142.1 JP143.1 JP144.1 JP145.1 JP146.1 JP147.1 JP148.1 JP149.1 JP150.1 JP151.1 JP152.1 JP153.1 JP154.1 JP155.1 JP156.1 JP157.1 JP158.1 JP159.1 JP160.1 JP161.1 JP162.1 JP163.1 JP164.1 JP165.1 JP166.1 JP167.1 JP168.1
N$1: C7.- JP95.3 JP95.4 X1.2 X1.10
N$2: JP95.5 JP95.6 X1.3 X1.11
N$3: JP95.7 JP95.8 X1.1
N$4: C7.+ JP95.1 JP95.2
N$5: JP103.1 JP104.1 JP105.1 JP106.1
N$6: JP4.17 JP4.18 JP94.7
N$7: JP4.15 JP4.16 JP94.5
N$8: JP4.13 JP4.14 JP94.3
N$9: JP4.11 JP4.12 JP94.1
N$10: JP4.9 JP4.10 JP94.2
N$11: JP4.7 JP4.8 JP94.4
N$12: JP4.5 JP4.6 JP94.6
N$13: JP4.3 JP4.4 JP94.8
N$14: JP5.1 JP6.1 JP7.1 JP8.1
N$15: JP59.1 JP60.1 JP61.1 JP62.1
N$16: JP4.1 JP4.2 JP94.10
N$17: JP4.19 JP4.20 JP94.9
N$18: JP107.1 JP108.1 JP109.1 JP110.1
N$19: JP63.1 JP64.1 JP65.1 JP66.1
N$20: JP67.1 JP68.1 JP169.1 JP170.1
N$21: JP178.1 JP179.1 JP180.1 JP181.1
N$22: JP182.1 JP183.1 JP184.1 JP185.1
N$23: JP186.1 JP187.1 JP188.1 JP189.1
N$24: JP190.1 JP191.1 JP192.1 JP193.1
N$25: JP194.1 JP195.1 JP196.1 JP197.1
N$26: JP198.1 JP199.1 JP200.1 JP201.1
N$27: JP202.1 JP203.1 JP204.1 JP205.1
N$28: JP206.1 JP207.1 JP208.1 JP209.1
N$29: JP210.1 JP211.1 JP212.1 JP213.1
N$30: JP214.1 JP215.1 JP216.1 JP217.1
N$31: JP218.1 JP219.1 JP220.1 JP221.1
N$32: JP222.1 JP223.1 JP224.1 JP225.1
N$33: JP226.1 JP227.1 JP228.1 JP229.1
N$34: JP230.1 JP231.1 JP232.1 JP233.1
N$35: JP234.1 JP235.1 JP236.1 JP237.1
N$36: JP238.1 JP239.1 JP240.1 JP241.1
N$37: JP242.1 JP243.1 JP244.1 JP245.1
N$38: JP246.1 JP247.1 JP248.1 JP249.1
N$39: JP250.1 JP251.1 JP252.1 JP253.1
N$40: JP254.1 JP255.1 JP256.1 JP257.1
N$41: JP258.1 JP259.1 JP260.1 JP261.1
N$42: JP262.1 JP263.1 JP264.1 JP265.1
N$43: JP266.1 JP267.1 JP268.1 JP269.1
N$44: JP270.1 JP271.1 JP272.1 JP273.1
N$45: JP274.1 JP275.1 JP276.1 JP277.1
N$46: JP278.1 JP279.1 JP280.1 JP281.1
N$47: JP282.1 JP283.1 JP284.1 JP285.1
N$48: JP286.1 JP287.1 JP288.1 JP289.1
N$49: JP290.1 JP291.1 JP292.1 JP293.1
N$50: JP294.1 JP295.1 JP296.1 JP297.1
N$51: JP298.1 JP299.1 JP300.1 JP301.1
N$52: JP302.1 JP303.1 JP304.1 JP305.1
N$53: JP306.1 JP307.1 JP308.1 JP309.1
N$54: JP310.1 JP311.1 JP312.1 JP313.1
N$55: JP314.1 JP315.1 JP316.1 JP317.1
N$56: JP318.1 JP319.1 JP320.1 JP321.1
N$57: JP322.1 JP323.1 JP324.1 JP325.1
N$58: JP326.1 JP327.1 JP328.1 JP329.1
N$59: JP330.1 JP331.1 JP332.1 JP333.1
N$60: JP334.1 JP335.1 JP336.1 JP337.1
N$61: JP338.1 JP339.1 JP340.1 JP341.1
N$62: JP342.1 JP343.1 JP344.1 JP345.1
N$63: JP346.1 JP347.1 JP348.1 JP349.1
N$64: JP350.1 JP351.1 JP352.1 JP353.1
N$65: JP354.1 JP355.1 JP356.1 JP357.1
N$66: JP358.1 JP359.1 JP360.1 JP361.1
N$67: JP362.1 JP363.1 JP364.1 JP365.1
N$68: JP366.1 JP367.1 JP368.1 JP369.1
N$69: JP370.1 JP371.1 JP372.1 JP373.1
N$70: JP374.1 JP375.1 JP376.1 JP377.1
N$71: JP378.1 JP379.1 JP380.1 JP381.1
N$72: JP382.1 JP383.1 JP384.1 JP385.1
N$73: JP386.1 JP387.1 JP388.1 JP389.1
N$74: JP390.1 JP391.1 JP392.1 JP393.1
N$75: JP394.1 JP395.1 JP396.1 JP397.1
N$76: JP398.1 JP399.1 JP400.1 JP401.1
N$77: JP402.1 JP403.1 JP404.1 JP405.1
N$78: JP406.1 JP407.1 JP408.1 JP409.1
N$79: JP410.1 JP411.1 JP412.1 JP413.1
N$80: JP414.1 JP415.1 JP416.1 JP417.1
N$81: JP418.1 JP419.1 JP420.1 JP421.1
N$82: JP422.1 JP423.1 JP424.1 JP425.1
N$83: JP426.1 JP427.1 JP428.1 JP429.1
N$84: JP430.1 JP431.1 JP432.1 JP433.1
N$85: JP434.1 JP435.1 JP436.1 JP437.1
N$86: JP438.1 JP439.1 JP440.1 JP441.1
N$87: JP442.1 JP443.1 JP444.1 JP445.1
N$88: JP446.1 JP447.1 JP448.1 JP449.1
N$89: JP450.1 JP451.1 JP452.1 JP453.1
N$90: JP454.1 JP455.1 JP456.1 JP457.1
N$91: JP458.1 JP459.1 JP460.1 JP461.1
N$92: JP462.1 JP463.1 JP464.1 JP465.1
N$93: JP466.1 JP467.1 JP468.1 JP469.1
N$94: JP470.1 JP471.1 JP472.1 JP473.1
N$95: JP474.1 JP475.1 JP476.1 JP477.1
N$96: JP478.1 JP479.1 JP480.1 JP481.1
N$97: JP482.1 JP483.1 JP484.1 JP485.1
N$98: JP486.1 JP487.1 JP488.1 JP489.1
N$99: JP490.1 JP491.1 JP492.1 JP493.1
N$100: JP494.1 JP495.1 JP496.1 JP497.1
N$101: JP498.1 JP499.1 JP500.1 JP501.1
N$102: JP502.1 JP503.1 JP504.1 JP505.1
N$103: JP549.1 JP550.1 JP551.1 JP552.1
N$104: JP553.1 JP554.1 JP555.1 JP556.1
N$105: JP557.1 JP558.1 JP559.1 JP560.1
N$106: JP561.1 JP562.1 JP563.1 JP564.1
N$107: JP565.1 JP566.1 JP567.1 JP568.1
N$108: JP569.1 JP570.1 JP571.1 JP572.1
N$109: JP573.1 JP574.1 JP575.1 JP576.1
N$110: JP577.1 JP578.1 JP579.1 JP580.1
N$111: JP581.1 JP582.1 JP583.1 JP584.1
N$112: JP585.1 JP586.1 JP587.1 JP588.1
N$113: JP589.1 JP590.1 JP591.1 JP592.1
N$114: JP593.1 JP594.1 JP595.1 JP596.1
N$115: JP597.1 JP598.1 JP599.1 JP600.1
N$116: JP601.1 JP602.1 JP603.1 JP604.1
N$117: JP605.1 JP606.1 JP607.1 JP608.1
N$118: JP609.1 JP610.1 JP611.1 JP612.1
N$119: JP613.1 JP614.1 JP615.1 JP616.1
N$120: JP617.1 JP618.1 JP619.1 JP620.1
N$121: JP621.1 JP622.1 JP623.1 JP624.1
N$122: JP625.1 JP626.1 JP627.1 JP628.1
N$123: JP629.1 JP630.1 JP631.1 JP632.1
N$124: JP633.1 JP634.1 JP635.1 JP636.1
N$125: JP637.1 JP638.1 JP639.1 JP640.1
N$126: JP641.1 JP642.1 JP643.1 JP644.1
N$127: JP645.1 JP646.1 JP647.1 JP648.1
N$128: JP649.1 JP650.1 JP651.1 JP652.1
N$129: JP653.1 JP654.1 JP655.1 JP656.1
N$130: JP657.1 JP658.1 JP659.1 JP660.1
VCC: JP1.1 JP3.1 JP3.2 JP34.1 JP35.1 JP36.1 JP37.1 JP38.1 JP39.1 JP40.1 JP41.1 JP42.1 JP43.1 JP44.1 JP45.1 JP46.1 JP47.1 JP48.1 JP49.1 JP50.1 JP51.1 JP52.1 JP53.1 JP54.1 JP55.1 JP56.1 JP57.1 JP58.1 JP99.1 JP100.1 JP101.1 JP102.1 JP111.1 JP112.1 JP113.1 JP114.1 JP115.1 JP116.1 JP117.1 JP118.1 JP119.1 JP120.1 JP121.1 JP122.1 JP123.1 JP124.1 JP125.1 JP126.1 JP127.1 JP128.1 JP129.1 JP130.1 JP131.1 JP132.1 JP133.1 JP134.1 JP135.1 JP136.1 JP137.1 JP138.1 JP139.1

## Tracks (layer width: path | path; a pad name or v marks a point on that pad's centre or on a via)
/CS2
  Bottom 0.61: JP1.4 JP3.8 JP3.7
/RD
  Bottom 0.61: JP1.14 JP3.28 JP3.27
/RES
  Bottom 0.61: JP1.2 JP3.4 JP3.3
/WR
  Bottom 0.61: JP1.15 JP3.30 JP3.29
A0
  Bottom 0.61: JP1.19 JP3.38 JP3.37
A1
  Bottom 0.61: JP1.18 JP3.36 JP3.35
A2
  Bottom 0.61: JP1.17 JP3.34 JP3.33
A3
  Bottom 0.61: JP1.16 JP3.32 JP3.31
CLK
  Bottom 0.61: JP1.13 JP3.26 JP3.25
CS1
  Bottom 0.61: JP1.3 JP3.6 JP3.5
D0
  Bottom 0.61: JP1.12 JP3.24 JP3.23
D1
  Bottom 0.61: JP1.11 JP3.22 JP3.21
D2
  Bottom 0.61: JP1.10 JP3.20 JP3.19
D3
  Bottom 0.61: JP1.9 JP3.18 JP3.17
D4
  Bottom 0.61: JP1.8 JP3.16 JP3.15
D5
  Bottom 0.61: JP1.7 JP3.14 JP3.13
D6
  Bottom 0.61: JP1.6 JP3.12 JP3.11
D7
  Bottom 0.61: JP1.5 JP3.10 JP3.9
GND
  Top 0.61: JP73.1 JP69.1 | JP69.1 JP89.1 | JP89.1 JP83.1 | JP83.1 JP74.1 | JP83.1 JP143.1 | JP89.1 JP2.1 | JP69.1 JP3.39 JP1.20
  Bottom 0.61: JP1.20 JP3.40 JP3.39 JP69.1 | JP73.1 JP72.1 JP77.1 JP70.1 JP69.1 | JP69.1 JP93.1 JP92.1 JP91.1 JP90.1 JP89.1 | JP89.1 JP84.1 JP85.1 JP86.1 JP87.1 JP88.1 JP79.1 JP80.1 JP81.1 JP82.1 JP83.1 | JP83.1 JP78.1 JP71.1 JP76.1 JP75.1 JP74.1 | JP83.1 JP168.1 JP164.1 JP165.1 JP166.1 JP167.1 JP163.1 JP159.1 JP155.1 JP151.1 JP162.1 JP161.1 JP160.1 JP156.1 JP157.1 JP158.1 JP154.1 JP153.1 JP152.1 JP148.1 JP149.1 JP150.1 JP144.1 JP145.1 JP141.1 JP140.1 JP147.1 JP146.1 JP142.1 JP143.1 | JP2.1 JP98.1 JP96.1 JP97.1 JP33.1 JP32.1 JP31.1 JP30.1 JP29.1 JP27.1 JP28.1 JP26.1 JP24.1 JP23.1 JP22.1 JP21.1 JP20.1 JP19.1 JP18.1 JP17.1 JP16.1 JP15.1 JP14.1 JP9.1 JP13.1 JP11.1 JP12.1 JP10.1 JP89.1
N$1
  Bottom 0.61: JP95.3 JP95.4 10.79,33.02 8.26,35.56 C7.- 5.08,41.91 6.43,43.26 X1.2 X1.10
N$2
  Bottom 0.61: JP95.5 JP95.6 11.43,35.56 10.16,36.83 10.16,40.64 11.43,41.91 11.43,49.53 10.16,50.8 8.85,50.8 X1.11 X1.3
N$3
  Bottom 0.61: JP95.7 JP95.8 12.7,53.34 10.16,55.88 6.99,55.88 5.08,53.98 5.08,49.53 X1.1
N$4
  Bottom 0.61: JP95.1 JP95.2 7.62,30.48 C7.+
N$5
  Bottom 0.61: JP103.1 JP104.1 JP105.1 JP106.1
N$6
  Bottom 0.305: JP4.18 3.81,25.4 1.91,23.5 1.91,9.53 3.81,7.62 JP94.7
  Bottom 0.61: JP4.17 JP4.18
N$7
  Bottom 0.305: JP4.16 3.81,22.86 2.54,21.59 2.54,11.43 3.81,10.16 JP94.5
  Bottom 0.61: JP4.15 JP4.16
N$8
  Bottom 0.305: JP4.14 5.08,20.32 3.17,18.41 3.17,13.34 3.81,12.7 JP94.3
  Bottom 0.61: JP4.13 JP4.14
N$9
  Bottom 0.61: JP4.11 JP4.12 5.71,17.78 5.08,17.14 JP94.1
N$10
  Bottom 0.61: JP94.2 JP4.10 JP4.9
N$11
  Bottom 0.61: JP4.7 JP4.8 JP94.4
N$12
  Bottom 0.61: JP94.6 JP4.6 JP4.5
N$13
  Bottom 0.61: JP4.3 JP4.4 JP94.8
N$14
  Bottom 0.61: JP8.1 JP7.1 JP6.1 JP5.1
N$15
  Bottom 0.61: JP62.1 JP61.1 JP60.1 JP59.1
N$16
  Bottom 0.61: JP94.10 JP4.2 JP4.1
N$17
  Bottom 0.305: JP4.20 2.54,27.94 1.27,26.67 1.27,6.35 2.54,5.08 JP94.9
  Bottom 0.61: JP4.19 JP4.20
N$18
  Bottom 0.61: JP107.1 JP108.1 JP109.1 JP110.1
N$19
  Bottom 0.61: JP65.1 JP64.1 JP63.1 JP66.1
N$20
  Bottom 0.61: JP169.1 JP170.1 JP67.1 JP68.1
N$21
  Bottom 0.61: JP181.1 JP180.1 JP179.1 JP178.1
N$22
  Bottom 0.61: JP182.1 JP183.1 JP184.1 JP185.1
N$23
  Bottom 0.61: JP186.1 JP187.1 JP188.1 JP189.1
N$24
  Bottom 0.61: JP192.1 JP193.1 JP190.1 JP191.1
N$25
  Bottom 0.61: JP197.1 JP196.1 JP195.1 JP194.1
N$26
  Bottom 0.61: JP198.1 JP199.1 JP200.1 JP201.1
N$27
  Bottom 0.61: JP202.1 JP203.1 JP204.1 JP205.1
N$28
  Bottom 0.61: JP208.1 JP209.1 JP206.1 JP207.1
N$29
  Bottom 0.61: JP213.1 JP212.1 JP211.1 JP210.1
N$30
  Bottom 0.61: JP214.1 JP215.1 JP216.1 JP217.1
N$31
  Bottom 0.61: JP218.1 JP219.1 JP220.1 JP221.1
N$32
  Bottom 0.61: JP224.1 JP225.1 JP222.1 JP223.1
N$33
  Bottom 0.61: JP229.1 JP228.1 JP227.1 JP226.1
N$34
  Bottom 0.61: JP230.1 JP231.1 JP232.1 JP233.1
N$35
  Bottom 0.61: JP234.1 JP235.1 JP236.1 JP237.1
N$36
  Bottom 0.61: JP240.1 JP241.1 JP238.1 JP239.1
N$37
  Bottom 0.61: JP245.1 JP244.1 JP243.1 JP242.1
N$38
  Bottom 0.61: JP246.1 JP247.1 JP248.1 JP249.1
N$39
  Bottom 0.61: JP250.1 JP251.1 JP252.1 JP253.1
N$40
  Bottom 0.61: JP256.1 JP257.1 JP254.1 JP255.1
N$41
  Bottom 0.61: JP261.1 JP260.1 JP259.1 JP258.1
N$42
  Bottom 0.61: JP262.1 JP263.1 JP264.1 JP265.1
N$43
  Bottom 0.61: JP266.1 JP267.1 JP268.1 JP269.1
N$44
  Bottom 0.61: JP272.1 JP273.1 JP270.1 JP271.1
N$45
  Bottom 0.61: JP277.1 JP276.1 JP275.1 JP274.1
N$46
  Bottom 0.61: JP278.1 JP279.1 JP280.1 JP281.1
N$47
  Bottom 0.61: JP282.1 JP283.1 JP284.1 JP285.1
N$48
  Bottom 0.61: JP288.1 JP289.1 JP286.1 JP287.1
N$49
  Bottom 0.61: JP293.1 JP292.1 JP291.1 JP290.1
N$50
  Bottom 0.61: JP294.1 JP295.1 JP296.1 JP297.1
N$51
  Bottom 0.61: JP298.1 JP299.1 JP300.1 JP301.1
N$52
  Bottom 0.61: JP304.1 JP305.1 JP302.1 JP303.1
N$53
  Bottom 0.61: JP309.1 JP308.1 JP307.1 JP306.1
N$54
  Bottom 0.61: JP310.1 JP311.1 JP312.1 JP313.1
N$55
  Bottom 0.61: JP314.1 JP315.1 JP316.1 JP317.1
N$56
  Bottom 0.61: JP320.1 JP321.1 JP318.1 JP319.1
N$57
  Bottom 0.61: JP325.1 JP324.1 JP323.1 JP322.1
N$58
  Bottom 0.61: JP326.1 JP327.1 JP328.1 JP329.1
N$59
  Bottom 0.61: JP330.1 JP331.1 JP332.1 JP333.1
N$60
  Bottom 0.61: JP336.1 JP337.1 JP334.1 JP335.1
N$61
  Bottom 0.61: JP341.1 JP340.1 JP339.1 JP338.1
N$62
  Bottom 0.61: JP342.1 JP343.1 JP344.1 JP345.1
N$63
  Bottom 0.61: JP346.1 JP347.1 JP348.1 JP349.1
N$64
  Bottom 0.61: JP352.1 JP353.1 JP350.1 JP351.1
N$65
  Bottom 0.61: JP354.1 JP355.1 JP356.1 JP357.1
N$66
  Bottom 0.61: JP358.1 JP359.1 JP360.1 JP361.1
N$67
  Bottom 0.61: JP365.1 JP364.1 JP363.1 JP362.1
N$68
  Bottom 0.61: JP366.1 JP367.1 JP368.1 JP369.1
N$69
  Bottom 0.61: JP370.1 JP371.1 JP372.1 JP373.1
N$70
  Bottom 0.61: JP376.1 JP377.1 JP374.1 JP375.1
N$71
  Bottom 0.61: JP381.1 JP380.1 JP379.1 JP378.1
N$72
  Bottom 0.61: JP382.1 JP383.1 JP384.1 JP385.1
N$73
  Bottom 0.61: JP386.1 JP387.1 JP388.1 JP389.1
N$74
  Bottom 0.61: JP392.1 JP393.1 JP390.1 JP391.1
N$75
  Bottom 0.61: JP397.1 JP396.1 JP395.1 JP394.1
N$76
  Bottom 0.61: JP401.1 JP400.1 JP399.1 JP398.1
N$77
  Bottom 0.61: JP405.1 JP404.1 JP403.1 JP402.1
N$78
  Bottom 0.61: JP409.1 JP408.1 JP407.1 JP406.1
N$79
  Bottom 0.61: JP413.1 JP412.1 JP411.1 JP410.1
N$80
  Bottom 0.61: JP417.1 JP416.1 JP415.1 JP414.1
N$81
  Bottom 0.61: JP421.1 JP420.1 JP419.1 JP418.1
N$82
  Bottom 0.61: JP425.1 JP424.1 JP423.1 JP422.1
N$83
  Bottom 0.61: JP429.1 JP428.1 JP427.1 JP426.1
N$84
  Bottom 0.61: JP433.1 JP432.1 JP431.1 JP430.1
N$85
  Bottom 0.61: JP437.1 JP436.1 JP435.1 JP434.1
N$86
  Bottom 0.61: JP441.1 JP440.1 JP439.1 JP438.1
N$87
  Bottom 0.61: JP445.1 JP444.1 JP443.1 JP442.1
N$88
  Bottom 0.61: JP449.1 JP448.1 JP447.1 JP446.1
N$89
  Bottom 0.61: JP453.1 JP452.1 JP451.1 JP450.1
N$90
  Bottom 0.61: JP457.1 JP456.1 JP455.1 JP454.1
N$91
  Bottom 0.61: JP461.1 JP460.1 JP459.1 JP458.1
N$92
  Bottom 0.61: JP465.1 JP464.1 JP463.1 JP462.1
N$93
  Bottom 0.61: JP469.1 JP468.1 JP467.1 JP466.1
N$94
  Bottom 0.61: JP473.1 JP472.1 JP471.1 JP470.1
N$95
  Bottom 0.61: JP477.1 JP476.1 JP475.1 JP474.1
N$96
  Bottom 0.61: JP481.1 JP480.1 JP479.1 JP478.1
N$97
  Bottom 0.61: JP485.1 JP484.1 JP483.1 JP482.1
N$98
  Bottom 0.61: JP489.1 JP488.1 JP487.1 JP486.1
N$99
  Bottom 0.61: JP493.1 JP492.1 JP491.1 JP490.1
N$100
  Bottom 0.61: JP497.1 JP496.1 JP495.1 JP494.1
N$101
  Bottom 0.61: JP501.1 JP500.1 JP499.1 JP498.1
N$102
  Bottom 0.61: JP505.1 JP504.1 JP503.1 JP502.1
N$103
  Bottom 0.61: JP552.1 JP551.1 JP550.1 JP549.1
N$104
  Bottom 0.61: JP556.1 JP555.1 JP554.1 JP553.1
N$105
  Bottom 0.61: JP560.1 JP559.1 JP558.1 JP557.1
N$106
  Bottom 0.61: JP564.1 JP563.1 JP562.1 JP561.1
N$107
  Bottom 0.61: JP568.1 JP567.1 JP566.1 JP565.1
N$108
  Bottom 0.61: JP572.1 JP571.1 JP570.1 JP569.1
N$109
  Bottom 0.61: JP576.1 JP575.1 JP574.1 JP573.1
N$110
  Bottom 0.61: JP580.1 JP579.1 JP578.1 JP577.1
N$111
  Bottom 0.61: JP584.1 JP583.1 JP582.1 JP581.1
N$112
  Bottom 0.61: JP588.1 JP587.1 JP586.1 JP585.1
N$113
  Bottom 0.61: JP592.1 JP591.1 JP590.1 JP589.1
N$114
  Bottom 0.61: JP596.1 JP595.1 JP594.1 JP593.1
N$115
  Bottom 0.61: JP600.1 JP599.1 JP598.1 JP597.1
N$116
  Bottom 0.61: JP604.1 JP603.1 JP602.1 JP601.1
N$117
  Bottom 0.61: JP608.1 JP607.1 JP606.1 JP605.1
N$118
  Bottom 0.61: JP612.1 JP611.1 JP610.1 JP609.1
N$119
  Bottom 0.61: JP616.1 JP615.1 JP614.1 JP613.1
N$120
  Bottom 0.61: JP620.1 JP619.1 JP618.1 JP617.1
N$121
  Bottom 0.61: JP624.1 JP623.1 JP622.1 JP621.1
N$122
  Bottom 0.61: JP628.1 JP627.1 JP626.1 JP625.1
N$123
  Bottom 0.61: JP632.1 JP631.1 JP630.1 JP629.1
N$124
  Bottom 0.61: JP636.1 JP635.1 JP634.1 JP633.1
N$125
  Bottom 0.61: JP640.1 JP639.1 JP638.1 JP637.1
N$126
  Bottom 0.61: JP644.1 JP643.1 JP642.1 JP641.1
N$127
  Bottom 0.61: JP648.1 JP647.1 JP646.1 JP645.1
N$128
  Bottom 0.61: JP652.1 JP651.1 JP650.1 JP649.1
N$129
  Bottom 0.61: JP656.1 JP655.1 JP654.1 JP653.1
N$130
  Bottom 0.61: JP660.1 JP659.1 JP658.1 JP657.1
VCC
  Top 0.61: JP122.1 JP123.1 JP121.1 95.89,55.88 96.52,55.24 96.52,31.11 95.89,30.48 | 95.89,30.48 JP54.1 | JP3.1 JP1.1 96.52,10.16 96.52,29.84 95.89,30.48
  Bottom 0.61: JP3.1 JP3.2 JP1.1 96.52,10.16 96.52,29.84 95.89,30.48 | 95.89,30.48 96.52,31.11 96.52,55.24 95.89,55.88 JP121.1 JP120.1 JP124.1 JP125.1 JP126.1 JP130.1 JP129.1 JP128.1 JP132.1 JP133.1 JP134.1 JP137.1 JP136.1 JP112.1 JP138.1 JP113.1 JP111.1 JP114.1 JP139.1 JP115.1 JP116.1 JP117.1 JP118.1 JP119.1 JP135.1 JP131.1 JP127.1 JP123.1 JP122.1 | 95.89,30.48 JP100.1 JP102.1 JP99.1 JP101.1 JP38.1 JP43.1 JP48.1 JP53.1 JP52.1 JP47.1 JP42.1 JP37.1 JP36.1 JP41.1 JP46.1 JP51.1 JP35.1 JP40.1 JP45.1 JP50.1 JP34.1 JP39.1 JP44.1 JP49.1 JP58.1 JP57.1 JP56.1 JP55.1 JP54.1

## Text on the board
tPlace: Rev.3 | 10.04.2024 | 01 | 02 | 03 | 04 | 05 | 06 | 07 | 08 | 09 | 10 | 11 | 12 | 13 | 14 | 15 | 16 | 17 | 18 | 19 | 20 | 21 | 22 | 23 | 24 | 25 | 26 | 27 | 28 | 29 | VCC | GND | G | R | L | A | 9 | 7 | 5 | 3 | 1 | 2 | 4 | 6 | 8 | 10 | GND | A0 | A1 | A2 | A3 | /WR | /RD | CLK | D0 | D1 | D2 | D3 | D4 | D5 | D6 | D7 | /CS2 | /CS1 | /RES | VCC
bPlace: GND | A0 | A1 | A2 | A3 | /WR | /RD | CLK | D0 | D1 | D2 | D3 | D4 | D5 | D6 | D7 | /CS2 | /CS1 | /RES | VCC